# Altium PCB Beambreak Array L - Receiver.PcbDoc
Units mm, origin at the board's own origin, x right, y up, seen from the top; angles counter-clockwise.
Board outline 12 x 106 mm, 2 copper layers (Top Layer, Bottom Layer), stack 1.57 mm thick; 38 components, 22 nets, 94 pads, 29 vias.
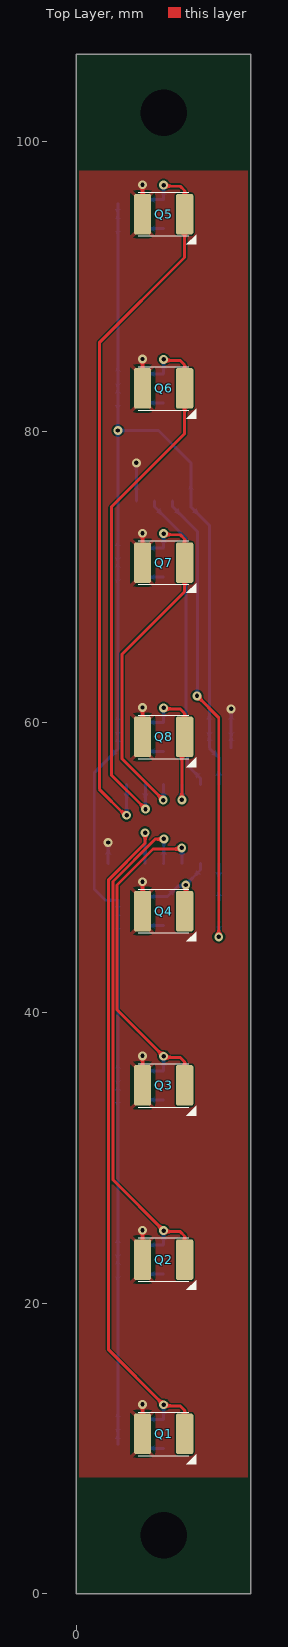
[diagram p0: Top Layer view]
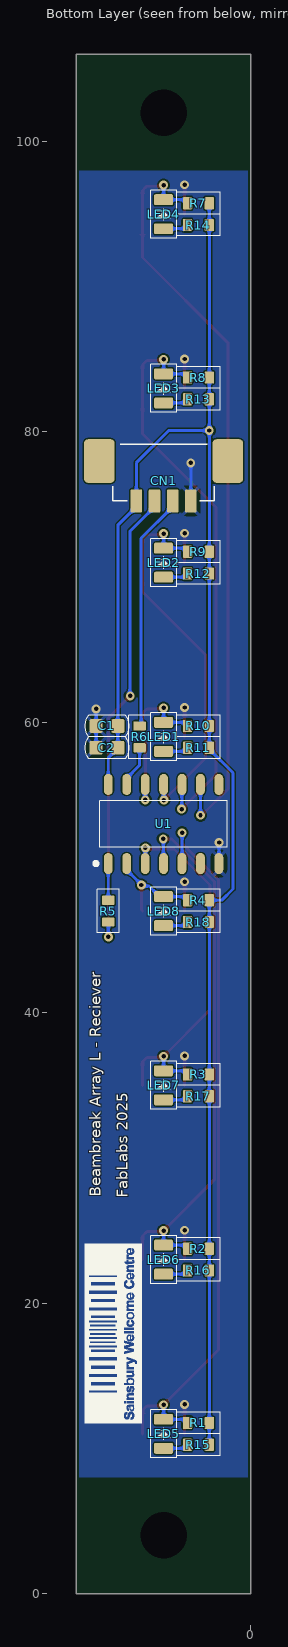
[diagram p1: Bottom Layer view, seen from below]
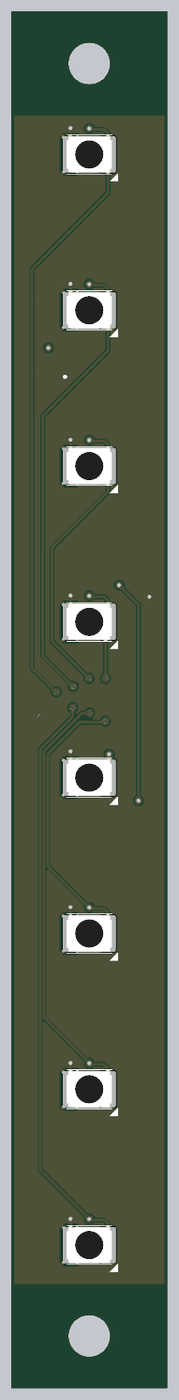
[diagram p2: 3D render of the assembled board from above, using the file's embedded part models]
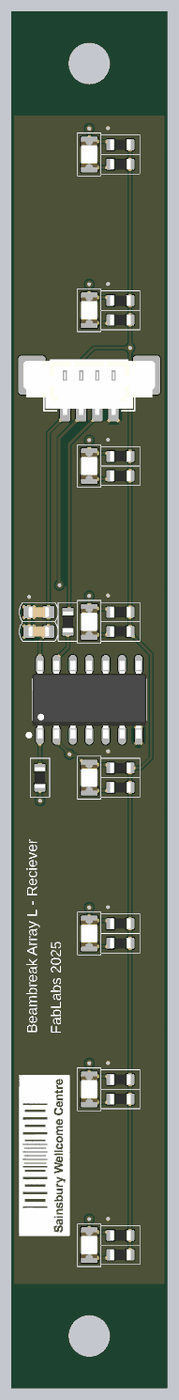
[diagram p3: 3D render of the assembled board from below, using the file's embedded part models]

## Layer stack, top to bottom
Top Solder: solder mask 0.0127, Solder Resist, Dk 3.8
Top Layer: signal copper 0.035
Dielectric: core 1.5, FR-4, Dk 4.5
Bottom Layer: signal copper 0.035
Bottom Solder: solder mask 0.0127, Solder Resist, Dk 3.8

## Board outline
0,0 0,106 12,106 12,0

## Design rules (kind name [scope] priority, off if disabled: settings)
BoardOutlineClearance [(OnLayer('Bottom Overlay') OR OnLayer('Top Overlay'))] p1: gap=0 ignorepadtopadclearanceinfootprint=FALSE
BoardOutlineClearance BoardOutlineClearance_1 [All] p2: gap=0.2 ignorepadtopadclearanceinfootprint=FALSE
Clearance [All] p1: gap=0.089 ignorepadtopadclearanceinfootprint=FALSE except(0.127: Arc-Via Track-Via SMDPad-Via THPad-Via Via-Via Via-Fill Via-Poly Via-Region Via-Text; 0.203: Arc-Hole Track-Hole Via-Hole Fill-Hole Poly-Hole Region-Hole Text-Hole)
ComponentClearance [All] p1: gap=0.089 collisioncheckmode=3 verticalgap=0.089 showdistances=TRUE
DiffPairsRouting JLCPCB_6L_90Ohm [InDifferentialPairClass('USB')] p1: maxlimit=0.127 minlimit=0.127 mostfreqgap=0.127 toplayer_minwidth=0.172 toplayer_maxwidth=0.172 toplayer_prefwidth=0.172 bottomlayer_minwidth=0.172 bottomlayer_maxwidth=0.172 bottomlayer_prefwidth=0.172 maxuncoupledlength=12.7
DiffPairsRouting JLCPCB_6L_120Ohm [InDifferentialPairClass('RS485')] p2: maxlimit=0.305 minlimit=0.127 mostfreqgap=0.305 toplayer_minwidth=0.16 toplayer_maxwidth=0.16 toplayer_prefwidth=0.16 bottomlayer_minwidth=0.16 bottomlayer_maxwidth=0.16 bottomlayer_prefwidth=0.16 maxuncoupledlength=12.7
Height [All] p1: minheight=0 maxheight=1816.048 prefheight=12.7
HoleSize [All] p1: absolutevalues=TRUE maxlimit=6.3 minlimit=0.2 maxpercent=80.000 minpercent=20.000
HoleToHoleClearance [All] p1: gap=0.25 allowstackedmicrovias=FALSE
MinimumAnnularRing [All] p1: minimumring=0.076
MinimumSolderMaskSliver [All] p1: minsoldermaskwidth=0
PlaneClearance [All] p1: clearance=0.089
PlaneConnect PlaneConnectPowerPads [InPadClass('PowerPads')] p1: planeconnectstyle=Direct reliefexpansion=0.508 reliefentries=4 reliefconductorwidth=0.254 reliefairgap=0.254
PlaneConnect [All] p2: pad.planeconnectstyle=Relief pad.reliefexpansion=0.3 pad.reliefentries=4 pad.reliefconductorwidth=0.089 pad.reliefairgap=0.089 via.planeconnectstyle=Direct via.reliefexpansion=0.3 via.reliefentries=4 via.reliefconductorwidth=0.127 via.reliefairgap=0.127
PolygonConnect PolygonConnectPowerPads [(InNet('GND') OR InNet('3V3') OR InNet('3V3A'))] p1: thpad.connectstyle=Relief thpad.reliefconductorwidth=0.254 thpad.reliefentries=4 thpad.polygonreliefangle="45 Angle" thpad.airgapwidth=0.254 smdpad.connectstyle=Relief smdpad.reliefconductorwidth=0.254 smdpad.reliefentries=4 smdpad.polygonreliefangle="45 Angle" smdpad.airgapwidth=0.254 via.connectstyle=Direct via.reliefconductorwidth=0.254 via.reliefentries=4 via.polygonreliefangle="45 Angle" via.airgapwidth=0.254
PolygonConnect [All] p2: connectstyle=Direct reliefconductorwidth=0.089 reliefentries=4 polygonreliefangle="90 Angle" airgapwidth=0.089
RoutingVias [All] p1: holewidth=0.2 width=0.45 viastyle="Through Hole" minholewidth=0.2 minwidth=0.45 maxholewidth=6.3 maxwidth=6.55
SilkToSilkClearance [All] p1: silktosilkclearance=0
SilkToSolderMaskClearance [IsPad] p1 off: minsilkscreentomaskgap=0.089 clearancetoexposedcopper=TRUE
SolderMaskExpansion [All] p1: expansion=0.075 istentingtop=FALSE
SupplyNets "Schematic Supply Nets_1" [InNet('VCC')] p1: voltage=0.000
SupplyNets "Schematic Supply Nets_4" [InNet('GND')] p2: voltage=0.000
Width [All] p1: maxlimit=1816.048 minlimit=0.089 preferedwidth=0.089
20 further rules are at their usual default settings.

## Components (designator, comment, footprint, x,y, rotation, side; value= is the part's Value field where it differs from the comment)
C1 "C0603-1uF-50V" CAP_CHIP_0603 9.9,59.75 r0 bottom value=1µF
C2 "C0603-100nF-50V" CAP_CHIP_0603 9.9,58.25 r180 bottom value=100nF
CN1 "IO" MOLEX_1.25_4P 6,77 r0 bottom
LED1 "DBG" LED_CHIP_0805 6,59 r270 bottom
LED2 "DBG" LED_CHIP_0805 6,71 r270 bottom
LED3 "DBG" LED_CHIP_0805 6,83 r270 bottom
LED4 "DBG" LED_CHIP_0805 6,95 r270 bottom
LED5 "DBG" LED_CHIP_0805 6,11 r270 bottom
LED6 "DBG" LED_CHIP_0805 6,23 r270 bottom
LED7 "DBG" LED_CHIP_0805 6,35 r270 bottom
LED8 "DBG" LED_CHIP_0805 6,47 r270 bottom
Q1 "VEMT3700F" PT_3528_NPN 6,11 r180 top
Q2 "VEMT3700F" PT_3528_NPN 6,23 r180 top
Q3 "VEMT3700F" PT_3528_NPN 6,35 r180 top
Q4 "VEMT3700F" PT_3528_NPN 6,47 r180 top
Q5 "VEMT3700F" PT_3528_NPN 6,95 r180 top
Q6 "VEMT3700F" PT_3528_NPN 6,83 r180 top
Q7 "VEMT3700F" PT_3528_NPN 6,71 r180 top
Q8 "VEMT3700F" PT_3528_NPN 6,59 r180 top
R1 "R0603-68K" RES_CHIP_0603 3.6,11.75 r180 bottom value=68k
R2 "R0603-68K" RES_CHIP_0603 3.6,23.75 r180 bottom value=68k
R3 "R0603-68K" RES_CHIP_0603 3.6,35.75 r180 bottom value=68k
R4 "R0603-68K" RES_CHIP_0603 3.6,47.75 r180 bottom value=68k
R5 "R0603-1K" RES_CHIP_0603 9.81,47 r90 bottom value=1k
R6 "R0603-0R" RES_CHIP_0603 7.65,59 r90 bottom value=0
R7 "R0603-68K" RES_CHIP_0603 3.6,95.75 r180 bottom value=68k
R8 "R0603-68K" RES_CHIP_0603 3.6,83.75 r180 bottom value=68k
R9 "R0603-68K" RES_CHIP_0603 3.6,71.75 r180 bottom value=68k
R10 "R0603-68K" RES_CHIP_0603 3.6,59.75 r180 bottom value=68k
R11 "R0603-10K" RES_CHIP_0603 3.6,58.25 r180 bottom value=10k
R12 "R0603-10K" RES_CHIP_0603 3.6,70.25 r180 bottom value=10k
R13 "R0603-10K" RES_CHIP_0603 3.6,82.25 r180 bottom value=10k
R14 "R0603-10K" RES_CHIP_0603 3.6,94.25 r180 bottom value=10k
R15 "R0603-10K" RES_CHIP_0603 3.6,10.25 r180 bottom value=10k
R16 "R0603-10K" RES_CHIP_0603 3.6,22.25 r180 bottom value=10k
R17 "R0603-10K" RES_CHIP_0603 3.6,34.25 r180 bottom value=10k
R18 "R0603-10K" RES_CHIP_0603 3.6,46.25 r180 bottom value=10k
U1 "CD4078B" SOIC14 6,53 r180 bottom

## Footprints (in the part's own frame and the unit in brackets; to place one, negate y for a bottom-side part, rotate by r counter-clockwise, add the part's x,y. Pads: shape width x height; smd on the part's side, far side on the other; paste and mask are expansions set on the pad)
CAP_CHIP_0603 [mm]
  rrect25% 0.9x0.95 smd: 1(-0.75,0) 2(0.75,0)
  silkscreen extent -1.5,-0.75 1.5,0.75, body extent -0.8,-0.4 0.8,0.4, height 0.8
LED_CHIP_0805 [mm]
  rrect25% 0.75x1.3 smd: 1(-1,0) 2(1,0)
  silkscreen extent -1.65,-0.9 1.65,0.9, body extent -1,-0.62 1,0.63, height 1
MOLEX_1.25_4P [mm]
  rrect25% 0.8x1.6 smd: 1(-1.875,1.75) 2(-0.625,1.75) 3(0.625,1.75) 4(1.875,1.75)
  rrect25% 2.1x3 smd: S1(-4.425,-1) S2(4.425,-1)
  silkscreen extent -3.5,-2.16 3.5,1.75, body extent -5.07,-2.1 5.07,2.1, height 4.7
PT_3528_NPN [mm] "3528 NPN Phototransistor"
  rrect25% 1.2x2.8 smd: 1(-1.45,0) 2(1.45,0)
  silkscreen extent -2.24,-1.5 1.75,2.09, body extent -1.75,-1.4 1.75,1.4, height 1.85
RES_CHIP_0603 [mm]
  rrect25% 0.65x0.85 smd: 1(-0.75,0) 2(0.75,0)
  silkscreen extent -1.5,-0.75 1.5,0.75, body extent -0.8,-0.4 0.8,0.4, height 0.45
SOIC14 [mm] "SOIC, 14-Leads, Body 8.65x3.90mm, Pitch 1.27mm, IPC Medium Density"
  oval 0.6x1.45 smd: 1(-3.81,-2.725) 2(-2.54,-2.725) 3(-1.27,-2.725) 4(0,-2.725) 5(1.27,-2.725) 6(2.54,-2.725) 7(3.81,-2.725) 8(3.81,2.725) 9(2.54,2.725) 10(1.27,2.725) 11(0,2.725) 12(-1.27,2.725) 13(-2.54,2.725) 14(-3.81,2.725)
  silkscreen extent -4.79,-2.85 4.4,1.6, body extent -4.4,-3 4.4,3, height 1.75

## Part data
C1: library part CMP-611-0033-11, "0603 Multilayer Ceramic Capacitors MLCC", Capacitor Type=Ceramic, Case/Package=0603, Dielectric=X5R, LCSC Part N.=C15849, PartNumber=CL10A105KB8NNNC, Tolerance=10%, Voltage Rating=50V, Mount=SMD, Pick&PlaceFootprint=C0603, RoHS=Yes
C2: library part CMP-611-0027-24, "0603 Multilayer Ceramic Capacitors MLCC", Capacitor Type=Ceramic, Case/Package=0603, Dielectric=X7R, LCSC Part N.=C14663, PartNumber=CC0603KRX7R9BB104, Tolerance=10%, Voltage Rating=50V, Mount=SMD, Pick&PlaceFootprint=C0603, RoHS=Yes
CN1: library part CMP-370-0030-7, "Conn Shrouded Header (3 Sides) HDR 4 POS 1.25mm Solder ST Top Entry SMD PicoBlade™ T/R", Current Rating=1A, LCSC Part N.=C17617036, PartNumber=53398-0471, Gender=Male, Mounting Technology="Surface Mount", Number of Positions=4, Number of Rows=1, Orientation=Vertical, Pitch=1.25mm
LED1 LED2 LED3 LED4 LED5 LED6 LED7 LED8: library part CMP-520-0019-2, "Red 0805 Light Emitting Diodes (LED) ROHS", Colour=Red, Forward Current=25mA, Forward Voltage=2.1V, LCSC Part N.=C84256, PartNumber=NCD0805R1, Mount="Surface Mount", Pick&PlaceFootprint=LED0805, Wavelength=620nm
Q1 Q2 Q3 Q4 Q5 Q6 Q7 Q8: library part CMP-540-0001-1, "No Phototransistor IR Chip Silicon 940nm 2-Pin PLCC T/R", Dark Current=200nA, LCSC Part N.=C5334342, Max Collector Current=50mA, PartNumber=VEMT3700F-GS08, Orientation="Top View", Polarity=NPN, Rise Time=6000ns, Wavelength=940nm
R1 R2 R3 R4 R7 R8 R9 R10: library part CMP-633-0107-3, "100mW Thick Film Resistors 75V ±100ppm/℃ ±1% 0603 Chip Resistor", Case/Package=0603, LCSC Part N.=C23231, Number of Resistors=1, PartNumber=0603WAF6802T5E, Power Rating=100mW, Tolerance=1%, Voltage Rating=75V, Mount="Surface Mount", Pick&PlaceFootprint=R0603
R5: library part CMP-633-0013-26, "100mW Thick Film Resistors 75V ±100ppm/℃ ±1% 0603 Chip Resistor", Case/Package=0603, LCSC Part N.=C21190, Number of Resistors=1, PartNumber=0603WAF1001T5E, Power Rating=100mW, Tolerance=1%, Voltage Rating=75V, Mount="Surface Mount", Pick&PlaceFootprint=R0603
R6: library part CMP-633-0049-25, "100mW Thick Film Resistors 75V ±100ppm/℃ ±1% 0603 Chip Resistor", Case/Package=0603, LCSC Part N.=DNP, Number of Resistors=1, PartNumber=0603WAF0000T5E, Power Rating=100mW, Tolerance=1%, Voltage Rating=75V, Mount="Surface Mount", Pick&PlaceFootprint=R0603
R11 R12 R13 R14 R15 R16 R17 R18: library part CMP-633-0002-26, "100mW Thick Film Resistors 75V ±100ppm/℃ ±1% 0603 Chip Resistor", Case/Package=0603, LCSC Part N.=C25804, Number of Resistors=1, PartNumber=0603WAF1002T5E, Power Rating=100mW, Tolerance=1%, Voltage Rating=75V, Mount="Surface Mount", Pick&PlaceFootprint=R0603
U1: library part CMP-950-0028-2, "IC GATE NOR/OR 8INPUT 14SOIC NOR/OR Gate Configurable 1 Circuit 8 Input 14-SOIC", LCSC Part N.=C84464, Max Supply Voltage=18V, Min Supply Voltage=3V, PartNumber=CD4078BM96, Channels=8, Logic Function="NOR, OR", Number of Bits=1, Number Of Circuits=1, Pick&PlaceFootprint=SOIC14, Propagation Delay=110ns

## Free pads (board coordinates)
  round 0 hole 3.2 unplated: 1(6,102) 1(6,4)

## Via types
v1: diameter 0.61, hole 0.305, Top Layer to Bottom Layer, tented both sides, 29 vias

## Nets (pads, with @x,y where several pads share a name; then routed paths per layer and width w, separated by ;. In a path a pad name is that pad's centre, name@x,y a point inside that pad or via, vN(x,y) a via of type N, cw(c..) or ccw(c..) an arc to the next point about the centre after c; other vN are vias at no path point)
GND: C1.2 C2.1 CN1.1 Q1.2 Q2.2 Q3.2 Q4.2 Q5.2 Q6.2 Q7.2 Q8.2 U1.7 | length 23
  Top Layer w0.203: Q1.2 v1(4.55,13.025) ; Q2.2 v1(4.55,25.025) ; Q3.2 v1(4.55,37.025) ; Q4.2 v1(4.55,49.025) ; Q8.2 v1(4.55,61.025) ; Q7.2 v1(4.55,73.025) ; Q6.2 v1(4.55,85.025) ; Q5.2 v1(4.55,97.025)
  Bottom Layer w0.203: v1(2.175,51.725) 2.183,51.717 2.183,50.283 U1.7 ; CN1.1 v1(4.125,77.875) ; C2.1 C1.2 10.65,60.85 v1(10.65,60.925)
INA: LED8.1 Q4.1 R4.1 U1.2 | length 7.3
  Top Layer w0.203: Q4.1 7.525,47.075 v1(7.525,48.8)
  Bottom Layer w0.203: R4.1 4.35,47.773 4.573,47.996 5.996,47.996 LED8.1 6.275,48 6.997,48.722 7.447,48.722 v1(7.525,48.8) 7.525,48.817 8.54,49.833 U1.2
INB: LED7.1 Q3.1 R3.1 U1.3 | length 25.5
  Top Layer w0.203: v1@7.1,51.275 5.275,51.275 2.8,48.8 2.8,40.2 6.078,36.922 7.153,36.922 7.45,36.625 Q3.1
  Bottom Layer w0.203: R3.1 4.35,35.773 4.573,35.996 5.996,35.996 LED7.1 v1(6,37) ; v1(7.25,51.35) 7.26,51.34 7.26,50.285 U1.3
INC: LED6.1 Q2.1 R2.1 U1.4 | length 37.9
  Top Layer w0.203: v1(6.025,51.975) 6.002,51.952 5.415,51.952 2.508,49.045 2.508,28.492 6.078,24.922 7.153,24.922 7.45,24.625 Q2.1
  Bottom Layer w0.203: R2.1 4.35,23.773 4.573,23.996 5.996,23.996 LED6.1 v1(6,25) ; U1.4 6.013,50.287 6.013,51.962 v1(6.025,51.975)
IND: LED5.1 Q1.1 R1.1 U1.5 | length 50
  Top Layer w0.203: v1(4.725,52.4) 4.725,51.675 2.216,49.166 2.216,16.784 v1(6,13) ; v1@6.078,12.922 7.153,12.922 7.45,12.625 Q1.1
  Bottom Layer w0.203: R1.1 4.35,11.773 4.573,11.996 5.996,11.996 LED5.1 v1(6,13) ; v1(4.725,52.4) 4.728,52.397 4.728,50.277 U1.5
INE: LED4.1 Q5.1 R7.1 U1.9 | length 52.7
  Top Layer w0.203: v1@3.35,53.625 1.575,55.4 1.575,86.15 7.45,92.025 Q5.1 7.45,96.625 7.153,96.922 6.078,96.922 v1(6,97)
  Bottom Layer w0.203: v1(3.455,53.6) 3.458,53.603 3.458,55.722 U1.9 ; R7.1 4.35,95.773 4.573,95.996 5.996,95.996 LED4.1 v1(6,97)
INF: LED3.1 Q6.1 R8.1 U1.10 | length 39.7
  Top Layer w0.203: v1(4.755,54.025) 2.4,56.38 2.4,74.825 7.45,79.875 Q6.1 7.45,84.625 7.153,84.922 6.078,84.922 v1(6,85)
  Bottom Layer w0.203: R8.1 4.35,83.773 4.573,83.996 5.996,83.996 LED3.1 v1(6,85) ; U1.10 4.743,55.712 4.743,54.037 v1(4.755,54.025)
ING: LED2.1 Q7.1 R9.1 U1.11 | length 26.4
  Top Layer w0.203: v1(5.98,54.65) 3.125,57.505 3.125,64.675 7.45,69 Q7.1 7.45,72.625 7.153,72.922 6.078,72.922 v1(6,73)
  Bottom Layer w0.203: R9.1 4.35,71.773 4.573,71.996 5.996,71.996 LED2.1 v1(6,73) ; v1(5.98,54.65) 5.99,54.66 5.99,55.715 U1.11
INH: LED1.1 Q8.1 R10.1 U1.12 | length 11.5
  Top Layer w0.203: v1(6,61) 6.078,60.922 7.153,60.922 7.45,60.625 Q8.1 7.26,58.81 v1(7.26,54.66)
  Bottom Layer w0.203: R10.1 4.35,59.773 4.573,59.996 5.996,59.996 LED1.1 v1(6,61) ; v1(7.26,54.66) 7.27,54.67 U1.12 U1.12@7.28,55.735
NetCN1_2: CN1.2 R6.2 | length 16.4
  Bottom Layer w0.203: CN1.2 5.375,74.85 7.55,72.675 7.55,59.85 R6.2
NetCN1_3: CN1.3 R5.1 | length 32.5
  Top Layer w0.203: v1(8.3,61.825) 9.8,60.325 v1(9.8,45.225)
  Bottom Layer w0.203: CN1.3 6.625,74.85 8.325,73.15 8.325,61.8 v1@8.275,61.75 ; v1(9.8,45.225) 9.8,46.24 R5.1
NetLED1_2: LED1.2 R11.1 | length 1.8
  Bottom Layer w0.203: R11.1 4.35,58.223 4.573,58 LED1.2
NetLED2_2: LED2.2 R12.1 | length 1.8
  Bottom Layer w0.203: R12.1 4.35,70.223 4.573,70 LED2.2
NetLED3_2: LED3.2 R13.1 | length 1.8
  Bottom Layer w0.203: R13.1 4.35,82.223 4.573,82 LED3.2
NetLED4_2: LED4.2 R14.1 | length 1.8
  Bottom Layer w0.203: R14.1 4.35,94.223 4.573,94 LED4.2
NetLED5_2: LED5.2 R15.1 | length 1.8
  Bottom Layer w0.203: R15.1 4.35,10.223 4.573,10 LED5.2
NetLED6_2: LED6.2 R16.1 | length 1.8
  Bottom Layer w0.203: R16.1 4.35,22.223 4.573,22 LED6.2
NetLED7_2: LED7.2 R17.1 | length 1.8
  Bottom Layer w0.203: R17.1 4.35,34.223 4.573,34 LED7.2
NetLED8_2: LED8.2 R18.1 | length 1.8
  Bottom Layer w0.203: R18.1 4.35,46.223 4.573,46 LED8.2
NOR_OUT: R6.1 U1.13 | length 2.9
  Bottom Layer w0.203: R6.1 7.65,57.04 8.54,56.15 U1.13
OR_OUT: R5.2 U1.1 | length 2.5
  Bottom Layer w0.203: R5.2 U1.1
VCC: C1.1 C2.2 CN1.4 R1.2 R2.2 R3.2 R4.2 R7.2 R8.2 R9.2 R10.2 R11.2 R12.2 R13.2 R14.2 R15.2 R16.2 R17.2 R18.2 U1.14 | length 116.2
  Bottom Layer w0.203: R15.2 R1.2 R16.2 R2.2 R17.2 R3.2 R18.2 R4.2 2,47.75 1.225,48.525 1.225,56.525 2.85,58.15 R11.2 R10.2 R12.2 R9.2 v1(2.85,80.1) ; R7.2 R14.2 R8.2 R13.2 v1(2.85,80.1) ; C2.2@9.15,58.225 9.81,57.565 U1.14 ; C2.2 C1.1 9.15,73.575 7.875,74.85 CN1.4 7.875,77.875 5.65,80.1 v1(2.85,80.1)
pads on no net: CN1.S1 CN1.S2 U1.6 U1.8

## Polygon pours and split planes (outlines as drawn)
GND on Top Layer "Top Layer-GND" (solid, remove dead copper, pour order 2): 0,8 0,98 12,98 12,8
GND on Bottom Layer "Top Layer-GND" (solid, remove dead copper, pour order 0): 0,8 0,98 12,98 12,8

## Silkscreen, mask and mechanical layers (free items; w line width, h text height)
Bottom Overlay:
  drawing of 8 lines, arcs and shapes, not listed
  text "Beambreak Array L - Reciever" at 10.042,27.319 h1.27 r270
  text "FabLabs 2025" at 8.192,27.256 h1.27 r270
Board Shape:
  the board outline again, w0.05